# Altium PCB PCB1.PcbDoc (part 2 of 3)
Units mm, origin at the board's own origin, x right, y up, seen from the top; angles counter-clockwise.
Board outline 76.07 x 51.31 mm, 2 copper layers (Top Layer, Bottom Layer), stack 0.771 mm thick; 93 components, 68 nets, 330 pads, 277 vias.
Unrouted connection lines stored in the file: 4.
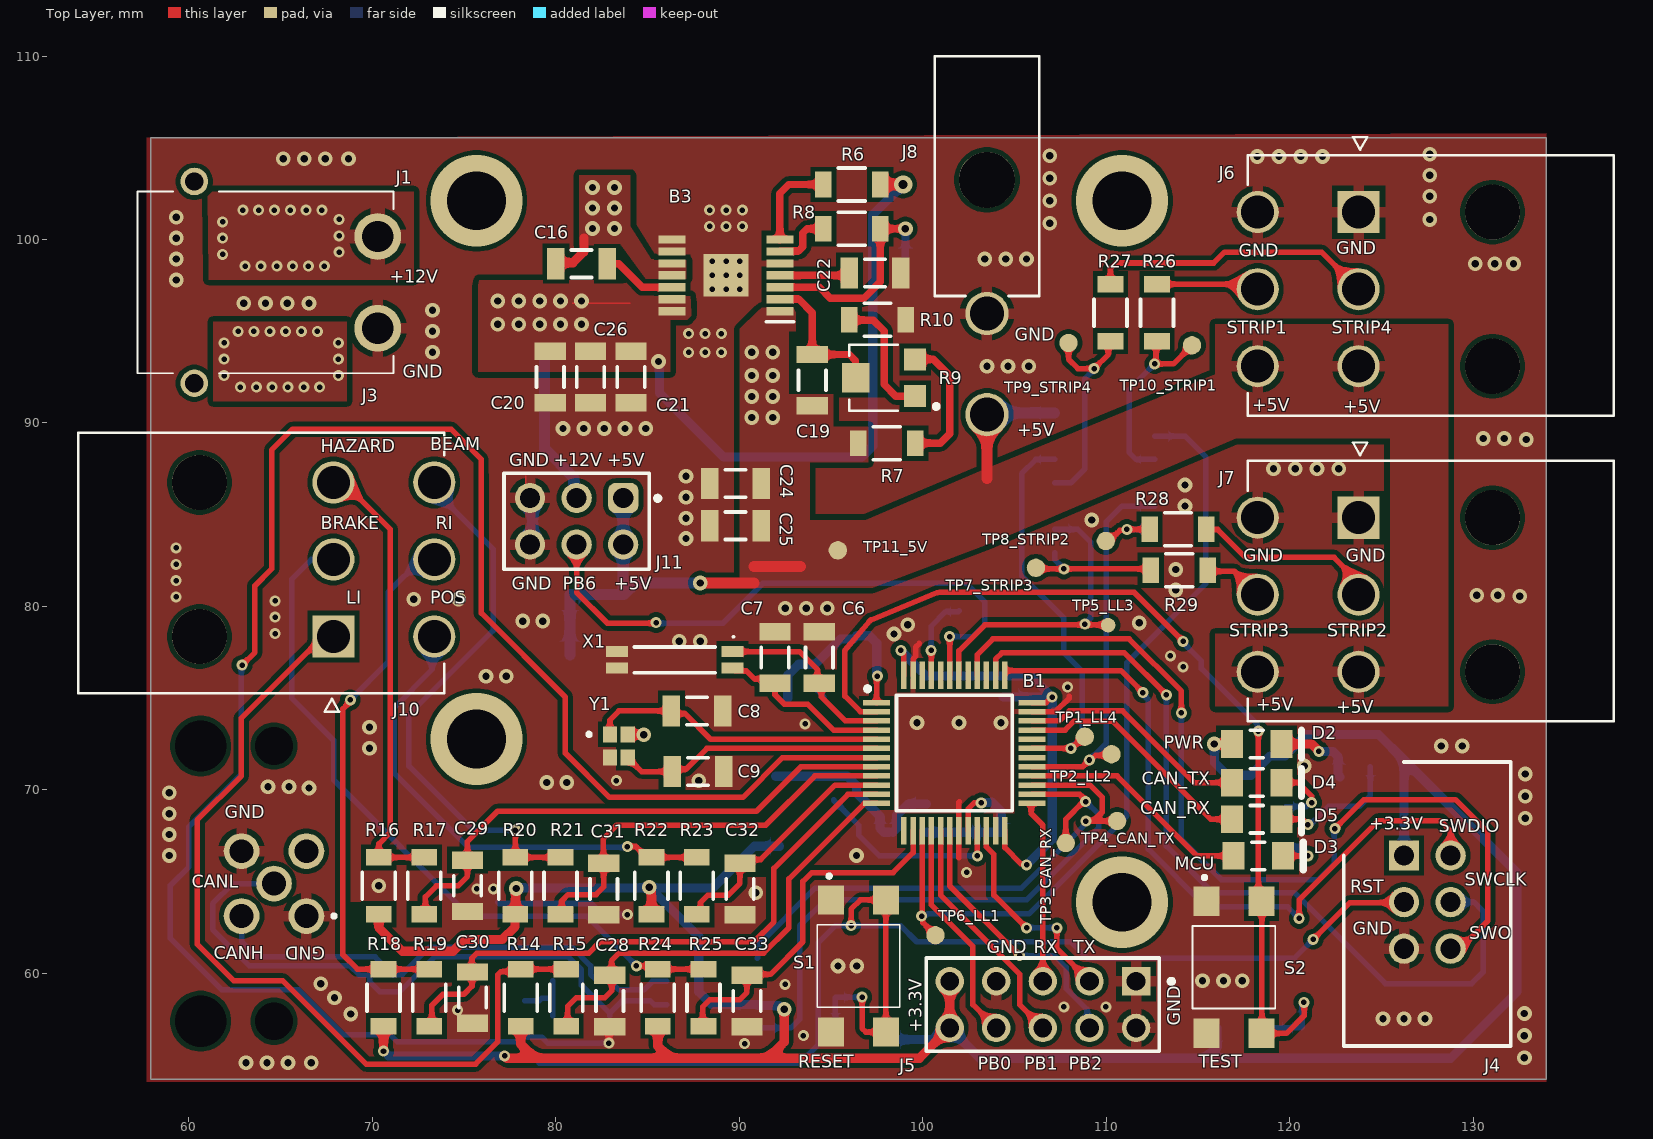
[diagram p0: Top Layer view]

## Part data (continued)
J8: "Pin Header, Power, 2 Rows, 2 Contacts, Through Hole Right Angle, Mini-Fit Jr. 5569", Color=Natural, Contact Resistance=10mΩ, Current Rating=9A, Dielectric Material=Polyamide, Flammability Rating="UL94 V-2", Insulation Resistance=1GΩ, Manufacturer=Molex, Manufacturer Lifecycle Status=ACTIVE, Manufacturer Part Number=39-30-1020, Max Operating Temperature=105°C, Min Operating Temperature=-40°C, Package=None, Supplier Part Number=5109837P, Voltage Rating=600V, Approvals="CSA, TUV, UL", Category="Headers and Wire Housings", Check_prices=https://www.snapeda.com/parts/39301020/Molex/view-part/?ref=eda, China RoHS=Compliant, ComponentLink1Description=https://datasheet.octopart.com:443/39-30-1020-Molex-datasheet-120074128.pdf?src-supplier=IHS, ComponentLink1URL=https://datasheet.octopart.com:443/39-30-1020-Molex-datasheet-120074128.pdf?src-supplier=IHS, ComponentLink2Description=https://datasheet.octopart.com:443/039301020-Molex-datasheet-8338717.pdf?src-supplier=Upverter, ComponentLink2URL=https://datasheet.octopart.com:443/039301020-Molex-datasheet-8338717.pdf?src-supplier=Upverter, ComponentLink3Description=https://datasheet.octopart.com:443/39-30-1020-Molex-datasheet-13785309.pdf?src-supplier=Molex, ComponentLink3URL=https://datasheet.octopart.com:443/39-30-1020-Molex-datasheet-13785309.pdf?src-supplier=Molex, ComponentLink4Description=https://sigma.octopart.com:443/15644801/technical_drawing/Molex-39-30-1020.pdf?src-supplier=Molex, ComponentLink4URL=https://sigma.octopart.com:443/15644801/technical_drawing/Molex-39-30-1020.pdf?src-supplier=Molex, ComponentLink5Description=https://datasheet.octopart.com:443/39-30-1020-Molex-datasheet-36854730.pdf?src-supplier=Farnell, ComponentLink5URL=https://datasheet.octopart.com:443/39-30-1020-Molex-datasheet-36854730.pdf?src-supplier=Farnell, ComponentLink6Description=https://datasheet.octopart.com:443/39-30-1020-Molex-datasheet-101582405.pdf?src-supplier=Farnell, ComponentLink6URL=https://datasheet.octopart.com:443/39-30-1020-Molex-datasheet-101582405.pdf?src-supplier=Farnell, ComponentLink7Description=https://datasheet.octopart.com:443/39-30-1020-..-Molex-datasheet-81470918.pdf?src-supplier=Farnell, ComponentLink7URL=https://datasheet.octopart.com:443/39-30-1020-..-Molex-datasheet-81470918.pdf?src-supplier=Farnell, ComponentLink8Description=https://datasheet.octopart.com:443/39-30-1020-Molex-datasheet-14711183.pdf?src-supplier=Farnell, ComponentLink8URL=https://datasheet.octopart.com:443/39-30-1020-Molex-datasheet-14711183.pdf?src-supplier=Farnell, ComponentLink9Description=https://datasheet.octopart.com:443/39-30-1020-Molex-datasheet-10541087.pdf?src-supplier=Farnell, ComponentLink9URL=https://datasheet.octopart.com:443/39-30-1020-Molex-datasheet-10541087.pdf?src-supplier=Farnell, ComponentLink10Description=https://datasheet.octopart.com:443/39301020-Molex-datasheet-514359.pdf?src-supplier=Farnell, ComponentLink10URL=https://datasheet.octopart.com:443/39301020-Molex-datasheet-514359.pdf?src-supplier=Farnell, ComponentLink11Description=https://datasheet.octopart.com:443/39-30-1020-Molex-datasheet-154749331.pdf?src-supplier=Master+Electronics, ComponentLink11URL=https://datasheet.octopart.com:443/39-30-1020-Molex-datasheet-154749331.pdf?src-supplier=Master+Electronics, ComponentLink12Description=https://datasheet.octopart.com:443/39-30-1020-Molex-datasheet-21827347.pdf?src-supplier=Electro+Sonic, ComponentLink12URL=https://datasheet.octopart.com:443/39-30-1020-Molex-datasheet-21827347.pdf?src-supplier=Electro+Sonic, ComponentLink13Description=https://datasheet.octopart.com:443/39-30-1020-Molex-datasheet-62104194.pdf?src-supplier=Electro+Sonic, ComponentLink13URL=https://datasheet.octopart.com:443/39-30-1020-Molex-datasheet-62104194.pdf?src-supplier=Electro+Sonic, ComponentLink14Description=https://datasheet.octopart.com:443/39-30-1020-Molex-datasheet-140183168.pdf?src-supplier=RS+(Formerly+Allied+Electronics), ComponentLink14URL=https://datasheet.octopart.com:443/39-30-1020-Molex-datasheet-140183168.pdf?src-supplier=RS+(Formerly+Allied+Electronics), ComponentLink15Description=https://datasheet.octopart.com:443/39-30-1020-Molex-datasheet-120148721.pdf?src-supplier=RS+(Formerly+Allied+Electronics), ComponentLink15URL=https://datasheet.octopart.com:443/39-30-1020-Molex-datasheet-120148721.pdf?src-supplier=RS+(Formerly+Allied+Electronics), ComponentLink16Description=https://datasheet.octopart.com:443/39-30-1020-Molex-datasheet-34442213.pdf?src-supplier=RS+(Formerly+Allied+Electronics), ComponentLink16URL=https://datasheet.octopart.com:443/39-30-1020-Molex-datasheet-34442213.pdf?src-supplier=RS+(Formerly+Allied+Electronics), ComponentLink17Description=https://datasheet.octopart.com:443/39-30-1020-Molex-datasheet-9997016.pdf?src-supplier=RS+(Formerly+Allied+Electronics), ComponentLink17URL=https://datasheet.octopart.com:443/39-30-1020-Molex-datasheet-9997016.pdf?src-supplier=RS+(Formerly+Allied+Electronics), ComponentLink18Description=https://datasheet.octopart.com:443/39-30-1020-Molex-datasheet-46140.pdf?src-supplier=RS+(Formerly+Allied+Electronics), ComponentLink18URL=https://datasheet.octopart.com:443/39-30-1020-Molex-datasheet-46140.pdf?src-supplier=RS+(Formerly+Allied+Electronics), ComponentLink19Description=https://datasheet.octopart.com:443/39301020-Molex-datasheet-82994803.pdf?src-supplier=Newark, ComponentLink19URL=https://datasheet.octopart.com:443/39301020-Molex-datasheet-82994803.pdf?src-supplier=Newark, ComponentLink20Description=https://datasheet.octopart.com:443/39-30-1020-Molex-datasheet-33002868.pdf?src-supplier=Newark, ComponentLink20URL=https://datasheet.octopart.com:443/39-30-1020-Molex-datasheet-33002868.pdf?src-supplier=Newark, ComponentLink21Description=https://datasheet.octopart.com:443/39-30-1020-Molex-datasheet-21207481.pdf?src-supplier=Newark, ComponentLink21URL=https://datasheet.octopart.com:443/39-30-1020-Molex-datasheet-21207481.pdf?src-supplier=Newark, ComponentLink22Description=https://datasheet.octopart.com:443/39-30-1020-Molex-datasheet-2405.pdf?src-supplier=Newark, ComponentLink22URL=https://datasheet.octopart.com:443/39-30-1020-Molex-datasheet-2405.pdf?src-supplier=Newark, ComponentLink23Description=https://datasheet.octopart.com:443/39301020-Molex-datasheet-137316104.pdf?src-supplier=Future+Electronics, ComponentLink23URL=https://datasheet.octopart.com:443/39301020-Molex-datasheet-137316104.pdf?src-supplier=Future+Electronics, ComponentLink24Description=https://datasheet.octopart.com:443/39-30-1020-Molex-datasheet-21395541.pdf?src-supplier=TME, ComponentLink24URL=https://datasheet.octopart.com:443/39-30-1020-Molex-datasheet-21395541.pdf?src-supplier=TME, ComponentLink25Description=https://datasheet.octopart.com:443/39301020-Molex-datasheet-7600579.pdf?src-supplier=Jameco, ComponentLink25URL=https://datasheet.octopart.com:443/39301020-Molex-datasheet-7600579.pdf?src-supplier=Jameco, ComponentLink26Description=https://datasheet.octopart.com:443/39-30-1020-Molex-datasheet-46912895.pdf?src-supplier=Jameco, ComponentLink26URL=https://datasheet.octopart.com:443/39-30-1020-Molex-datasheet-46912895.pdf?src-supplier=Jameco, ComponentLink27Description=https://datasheet.octopart.com:443/39-30-1020-Molex-datasheet-131607.pdf?src-supplier=DigiKey, ComponentLink27URL=https://datasheet.octopart.com:443/39-30-1020-Molex-datasheet-131607.pdf?src-supplier=DigiKey, ComponentLink28Description=http://sigma.octopart.com:80/15645372/rohs_certificate/Molex-39-30-1020.pdf?src-supplier=Compliance+Statements, ComponentLink28URL=http://sigma.octopart.com:80/15645372/rohs_certificate/Molex-39-30-1020.pdf?src-supplier=Compliance+Statements, ComponentLink29Description=http://sigma.octopart.com:80/conflict_mineral_statement/Molex-company-72.pdf?src-supplier=Compliance+Statements, ComponentLink29URL=http://sigma.octopart.com:80/conflict_mineral_statement/Molex-company-72.pdf?src-supplier=Compliance+Statements, ComponentLink30Description=http://sigma.octopart.com:80/rohs_statement/Molex-company-73.pdf?src-supplier=Compliance+Statements, ComponentLink30URL=http://sigma.octopart.com:80/rohs_statement/Molex-company-73.pdf?src-supplier=Compliance+Statements, ComponentLink31Description=http://sigma.octopart.com:80/reach_statement/Molex-company-74.pdf?src-supplier=Compliance+Statements, ComponentLink31URL=http://sigma.octopart.com:80/reach_statement/Molex-company-74.pdf?src-supplier=Compliance+Statements, Connector Type="Power, Rectangular", Contact Gender=Male, Contact Material=Brass, Contact Plating=Tin, Country of Origin=US, Depth=13.38mm, ELV=Compliant, Gender=Male, Glow Wire Compliant=Non-compliant, Halogen Free="Low Halogen", Height=14.76mm, Housing Material=Nylon, Lead Free="Lead Free", Lead Pitch=4.2mm, Length=36.07mm, Lifecycle Status=Production, Material=Nylon, MF=Molex, Mounting Technology="PCB, Through Hole", MP=39301020, Number of Circuits=2, Number of Contacts=2, Number of Poles=2, Number of Positions=2, Number of Rows=2, Orientation="Right Angle", Pins=2, Pitch=4.2mm, Plating Thickness=2.54µm, Radiation Hardening=No, REACH SVHC=Yes, RoHS=Compliant, Row Spacing=4.2mm, Schedule B="8536694040, 8536694040|8536694040, 8536694040|8536694040|8536694040, 8536694040|8536694040|8536694040|8536694040", SnapEDA_Link=https://www.snapeda.com/parts/39301020/Molex/view-part/?ref=snap, Stock=13288, Supplier=RS, Termination=Solder, Voltage Rating (AC)=600V, Voltage Rating (DC)=600V, Working Voltage=600V
J10: "M12, A Code, 4A, 05 pins, Male Contact, Hexagonal, M12*1.0, PCB 90ø, Front Fastened, IP67", Current Rating=4A, Manufacturer="Amphenol LTW", Manufacturer_Name=Amphenol, Mouser Part Number=523-M12A05PMMRSF7003, Supplier Part Number=50AC2957, Voltage Rating=60V, Arrow Part Number=M12A-05PMMR-SF7003, Arrow Price/Stock=https://www.arrow.com/en/products/m12a-05pmmr-sf7003/amphenol?utm_currency=USD&region=nac, Category="Circular Connectors", ComponentLink1Description=https://datasheet.octopart.com:443/M12A-05PMMR-SF7003-Amphenol-datasheet-182346588.pdf?src-supplier=IHS, ComponentLink1URL=https://datasheet.octopart.com:443/M12A-05PMMR-SF7003-Amphenol-datasheet-182346588.pdf?src-supplier=IHS, ComponentLink2Description=https://datasheet.octopart.com:443/M12A-05PMMR-SF7003-Amphenol-LTW-datasheet-184719079.pdf?src-supplier=TME, ComponentLink2URL=https://datasheet.octopart.com:443/M12A-05PMMR-SF7003-Amphenol-LTW-datasheet-184719079.pdf?src-supplier=TME, ComponentLink3Description=https://datasheet.octopart.com:443/M12A-05PMMR-SF7003-Amphenol-LTW-datasheet-180194516.pdf?src-supplier=JRH+Electronics, ComponentLink3URL=https://datasheet.octopart.com:443/M12A-05PMMR-SF7003-Amphenol-LTW-datasheet-180194516.pdf?src-supplier=JRH+Electronics, Connector Type=Signal, Datasheet Link=https://amphenolltw.com/down.php?prod_files=605433, Gender=Male, Geometry.Height=15mm, Lifecycle Status=Production, Manufacturer Part Number=M12A-05PMMR-SF7003, Manufacturer_Part_Number=M12A-05PMMR-SF7003, Mouser Price/Stock=https://www.mouser.co.uk/ProductDetail/Amphenol-LTW/M12A-05PMMR-SF7003?qs=f9yNj16SXrIdWSE1H9dLLQ%3D%3D, Number of Positions=5, Pins=5, RoHS=Compliant, Stock=32, Supplier=Avnet
J11: library part CMP-1502-01072-3, Color=Black, Contact Resistance=20mΩ, Current Rating=3A, Max Operating Temperature=105°C, Min Operating Temperature=-40°C, Operating Supply Voltage=250V, Connector Type="Male Pin", Contact Material=Copper, Contact Mating Length=5.9944mm, Contact Plating=Gold, Gender=Male, Height=8.89mm, Lead Pitch=2.54mm, Mount="Through Hole", NexarPartId=32855529, Number of Contacts=6, Number of Pins=6, Number of Positions=6, Number of Rows=2, Orientation=Vertical, Packaging=Bulk, Pitch=2.54mm, REACH SVHC=Unknown, RoHS=Compliant, Row Spacing=2.54mm, Termination=Solder, Voltage Rating=250V
L1 L2: "Ferrite Beads Multi-Layer 600Ohm 25% 100MHz 1A 0.15Ohm DCR 0603 T/R", Case Code (Imperial)=0603, Case Code (Metric)=1608, Clock Frequency=100MHz, Current Rating=1A, DC Resistance (DCR)=150mΩ, Manufacturer=TDK, Manufacturer Lifecycle Status=PRODUCTION, Max Operating Temperature=125°C, Min Operating Temperature=-55°C, Package="0603 TDK", Supplier Part Number=2800777, Tolerance=25%, Case/Package=0603, Category="Ferrite Beads and Chips", Check_prices=https://www.snapeda.com/parts/MPZ1608S601ATA00/TDK/view-part/?ref=eda, China RoHS=Compliant, ComponentLink1Description=https://datasheet.octopart.com:443/MPZ1608S601ATA00-TDK-datasheet-155380319.pdf?src-supplier=TDK, ComponentLink1URL=https://datasheet.octopart.com:443/MPZ1608S601ATA00-TDK-datasheet-155380319.pdf?src-supplier=TDK, ComponentLink2Description=https://datasheet.octopart.com:443/MPZ1608S601ATA00-TDK-datasheet-141913842.pdf?src-supplier=TME, ComponentLink2URL=https://datasheet.octopart.com:443/MPZ1608S601ATA00-TDK-datasheet-141913842.pdf?src-supplier=TME, ComponentLink3Description=https://datasheet.octopart.com:443/MPZ1608S601ATA00-TDK-datasheet-82475260.pdf?src-supplier=Newark, ComponentLink3URL=https://datasheet.octopart.com:443/MPZ1608S601ATA00-TDK-datasheet-82475260.pdf?src-supplier=Newark, ComponentLink4Description=https://datasheet.octopart.com:443/MPZ1608S601ATA00-TDK-datasheet-99917310.pdf?src-supplier=Newark, ComponentLink4URL=https://datasheet.octopart.com:443/MPZ1608S601ATA00-TDK-datasheet-99917310.pdf?src-supplier=Newark, ComponentLink5Description=https://datasheet.octopart.com:443/MPZ1608S601ATA00-TDK-datasheet-8852356.pdf?src-supplier=Newark, ComponentLink5URL=https://datasheet.octopart.com:443/MPZ1608S601ATA00-TDK-datasheet-8852356.pdf?src-supplier=Newark, ComponentLink6Description=https://datasheet.octopart.com:443/MPZ1608S601ATA00-TDK-datasheet-21631858.pdf?src-supplier=Farnell, ComponentLink6URL=https://datasheet.octopart.com:443/MPZ1608S601ATA00-TDK-datasheet-21631858.pdf?src-supplier=Farnell, ComponentLink7Description=https://datasheet.octopart.com:443/MPZ1608S601ATA00-TDK-datasheet-38423207.pdf?src-supplier=Future+Electronics, ComponentLink7URL=https://datasheet.octopart.com:443/MPZ1608S601ATA00-TDK-datasheet-38423207.pdf?src-supplier=Future+Electronics, Core Material=Ferrite, Depth=800µm, ESR=150mΩ, Height=800µm, Impedance=600Ω, Lead Free="Lead Free", Length=1.6mm, Lifecycle Status=Production, Manufacturer Part Number=MPZ1608S601ATA00, Max DC Current=1A, Max Length=1.75mm, Max Width=950µm, MF=TDK, Min Length=1.45mm, Min Width=650µm, Mounting Technology="Surface Mount", MP=MPZ1608S601ATA00, Number of Circuits=1, Number of Terminals=2, Packaging="Cut Tape", REACH SVHC=Yes, RMS Current (Irms)=1A, RoHS=Compliant, Schedule B="8504500000, 8504500000|8504500000|8504500000|8504500000|8504500000", SnapEDA_Link=https://www.snapeda.com/parts/MPZ1608S601ATA00/TDK/view-part/?ref=snap, Stock=80000, Supplier=Farnell, Termination=SMD/SMT, Test Frequency=100MHz, Weight=2.012816mg, Width=800µm
L3: "Inductor High Current Shielded Wirewound 3.3uH 20% 100KHz 10A 11.8mOhm DCR 4040 T/R", Case Code (Imperial)=4040, Current Rating=10A, DC Resistance (DCR)=11.8mΩ, Inductance Tolerance=20%, Manufacturer=Vishay, Max DC Current=18.6A, Max Operating Temperature=125°C, Min Operating Temperature=-55°C, Mouser Part Number=70-IHLP4040DZER3R3M0, Self Resonant Frequency=5MHz, Supplier Part Number=1547037, Test Frequency=100kHz, Arrow Part Number=IHLP4040DZER3R3M01, Arrow Price/Stock=https://www.arrow.com/en/products/ihlp4040dzer3r3m01/vishay?region=nac, Case/Package=4040, Category="Fixed Inductors", China RoHS=Compliant, ComponentLink1Description=https://datasheet.octopart.com:443/IHLP4040DZER3R3M01-Vishay-datasheet-181468593.pdf?src-supplier=IHS, ComponentLink1URL=https://datasheet.octopart.com:443/IHLP4040DZER3R3M01-Vishay-datasheet-181468593.pdf?src-supplier=IHS, ComponentLink2Description=https://datasheet.octopart.com:443/IHLP4040DZER3R3M01-Vishay-Dale-datasheet-181465866.pdf?src-supplier=IHS, ComponentLink2URL=https://datasheet.octopart.com:443/IHLP4040DZER3R3M01-Vishay-Dale-datasheet-181465866.pdf?src-supplier=IHS, ComponentLink3Description=https://datasheet.octopart.com:443/IHLP4040DZER3R3M01-Vishay-datasheet-67039456.pdf?src-supplier=Farnell, ComponentLink3URL=https://datasheet.octopart.com:443/IHLP4040DZER3R3M01-Vishay-datasheet-67039456.pdf?src-supplier=Farnell, ComponentLink4Description=https://datasheet.octopart.com:443/IHLP4040DZER3R3M01-Vishay-datasheet-167142.pdf?src-supplier=Farnell, ComponentLink4URL=https://datasheet.octopart.com:443/IHLP4040DZER3R3M01-Vishay-datasheet-167142.pdf?src-supplier=Farnell, ComponentLink5Description=https://datasheet.octopart.com/IHLP4040DZER3R3M01-Vishay-datasheet-12542609.pdf, ComponentLink5URL=https://datasheet.octopart.com/IHLP4040DZER3R3M01-Vishay-datasheet-12542609.pdf, ComponentLink6Description=https://datasheet.octopart.com/IHLP4040DZER3R3M01-Vishay-datasheet-12537444.pdf, ComponentLink6URL=https://datasheet.octopart.com/IHLP4040DZER3R3M01-Vishay-datasheet-12537444.pdf, ComponentLink7Description=https://datasheet.octopart.com/IHLP4040DZER3R3M01-Vishay-datasheet-12514016.pdf, ComponentLink7URL=https://datasheet.octopart.com/IHLP4040DZER3R3M01-Vishay-datasheet-12514016.pdf, ComponentLink8Description=https://datasheet.octopart.com/IHLP4040DZER3R3M01-Vishay-datasheet-5394347.pdf, ComponentLink8URL=https://datasheet.octopart.com/IHLP4040DZER3R3M01-Vishay-datasheet-5394347.pdf, ComponentLink9Description=https://datasheet.octopart.com:443/IHLP4040DZER3R3M01-Vishay-datasheet-8434461.pdf?src-supplier=Newark, ComponentLink9URL=https://datasheet.octopart.com:443/IHLP4040DZER3R3M01-Vishay-datasheet-8434461.pdf?src-supplier=Newark, ComponentLink10Description=https://datasheet.octopart.com:443/IHLP4040DZER3R3M01-Vishay-datasheet-62320562.pdf?src-supplier=element14+APAC, ComponentLink10URL=https://datasheet.octopart.com:443/IHLP4040DZER3R3M01-Vishay-datasheet-62320562.pdf?src-supplier=element14+APAC, ComponentLink11Description=https://datasheet.octopart.com:443/IHLP4040DZER3R3M01-Vishay-datasheet-101783941.pdf?src-supplier=Future+Electronics, ComponentLink11URL=https://datasheet.octopart.com:443/IHLP4040DZER3R3M01-Vishay-datasheet-101783941.pdf?src-supplier=Future+Electronics, ComponentLink12Description=https://datasheet.octopart.com:443/IHLP4040DZER3R3M01-Vishay-datasheet-12531877.pdf?src-supplier=Future+Electronics, ComponentLink12URL=https://datasheet.octopart.com:443/IHLP4040DZER3R3M01-Vishay-datasheet-12531877.pdf?src-supplier=Future+Electronics, ComponentLink13Description=https://datasheet.octopart.com:443/IHLP4040DZER3R3M01-Vishay-Dale-datasheet-42936488.pdf?src-supplier=RS+(Formerly+Allied+Electronics), ComponentLink13URL=https://datasheet.octopart.com:443/IHLP4040DZER3R3M01-Vishay-Dale-datasheet-42936488.pdf?src-supplier=RS+(Formerly+Allied+Electronics), ComponentLink14Description=https://datasheet.octopart.com:443/IHLP4040DZER3R3M01-Vishay-datasheet-140572121.pdf?src-supplier=Arrow.cn, ComponentLink14URL=https://datasheet.octopart.com:443/IHLP4040DZER3R3M01-Vishay-datasheet-140572121.pdf?src-supplier=Arrow.cn, ComponentLink15Description=http://sigma.octopart.com:80/rohs_statement/Vishay-company-15.pdf?src-supplier=Compliance+Statements, ComponentLink15URL=http://sigma.octopart.com:80/rohs_statement/Vishay-company-15.pdf?src-supplier=Compliance+Statements, Composition=Wirewound, Contact Plating=Tin, Core Material=Composite, Datasheet Link=https://www.vishay.com/docs/34193/ihlp-4040dz-01.pdf, Depth=10.3mm, ESR=14.4mΩ, Geometry.Height=4mm, Height=4mm, Height - Seated (Max)=3.9878mm, Lead Free="Lead Free", Lifecycle Status=Production, Manufacturer Part Number=IHLP4040DZER3R3M01, Manufacturer_Name=Vishay, Manufacturer_Part_Number=IHLP4040DZER3R3M01, Max Current Rating=10A, Military Standard=Not, Mounting Technology="Surface Mount", Mouser Price/Stock=https://www.mouser.co.uk/ProductDetail/Vishay-Dale/IHLP4040DZER3R3M01?qs=UUKq9QDXQ0nKJM%252B3xlQGHA%3D%3D, Number of Circuits=1, Number of Terminals=2, Radiation Hardening=No, REACH SVHC=Yes, RMS Current (Irms)=10A, RoHS=Compliant, Saturation Current=18.6A, Schedule B="8504500000, 8504500000|8504500000|8504500000|8504500000|8504500000", Shielding=Yes, Stock=559, Supplier=Farnell, Termination=SMD/SMT, Tolerance=20%, Weight=2.000002g, Width=10.16mm
R1 R2 R3 R4 R5 R6 R7 R8 R10 R11 R12 R13 R14 R15 R16 R17 R18 R19 R20 R21 R22 R23 R24 R25 R26 R27 R28 R29 R30: library part CMP-04015-098385-1, "40.2kΩ ±1% 0.25W Chip Resistor 1206 Thick Film AEC-Q200 Qualified", Case Code (Imperial)=1206, Case Code (Metric)=3216, Max Operating Temperature=155°C, Min Operating Temperature=-55°C, Package Quantity=5000, Power Rating=250mW, Resistance=40.2kR, Temperature Coefficient=100ppm/°C, Tolerance=1%, Voltage Rating=200V, Case/Package=1206, Height=0.6mm, Lead Free="Contains Lead", Length=3.2mm, Packaging="Tape and Reel", RoHS Compliant=No, Series=RK73H, Termination=SMD/SMT, Voltage Rating (DC)=200V, Width=1.6mm
R9: library part TC33X-2-503E, "Adjustable Resistors – SMD; BOURNS; TC33X-2-503E; Cermet; 1.2 mm; 100 mW; Surface Mount", Color=Silver, Manufacturer=Bourns, Max Operating Temperature=100°C, Max Power Dissipation=100mW, Min Operating Temperature=-40°C, Package="1608 Bourns", Power Dissipation=150mW, Supplier Part Number=TC33X-503ECT-ND, Temperature Coefficient=250ppm/°C, Tolerance=25%, Voltage Rating (DC)=50V, Category="Variable Resistors and Potentiometers", Check_prices=https://www.snapeda.com/parts/TC33X-2-503E/Bourns/view-part/467769/?ref=eda, ComponentLink1Description=https://datasheet.octopart.com:443/TC33X-2-503E-Bourns-datasheet-182142024.pdf?src-supplier=IHS, ComponentLink1URL=https://datasheet.octopart.com:443/TC33X-2-503E-Bourns-datasheet-182142024.pdf?src-supplier=IHS, ComponentLink2Description=https://datasheet.octopart.com:443/TC33X-2-503E-Bourns-datasheet-11551316.pdf?src-supplier=Electro+Sonic, ComponentLink2URL=https://datasheet.octopart.com:443/TC33X-2-503E-Bourns-datasheet-11551316.pdf?src-supplier=Electro+Sonic, ComponentLink3Description=https://datasheet.octopart.com:443/TC33X-2-503E-Bourns-datasheet-154730028.pdf?src-supplier=Electro+Sonic, ComponentLink3URL=https://datasheet.octopart.com:443/TC33X-2-503E-Bourns-datasheet-154730028.pdf?src-supplier=Electro+Sonic, ComponentLink4Description=https://datasheet.octopart.com:443/TC33X-2-503E-Bourns-datasheet-67039831.pdf?src-supplier=element14+APAC, ComponentLink4URL=https://datasheet.octopart.com:443/TC33X-2-503E-Bourns-datasheet-67039831.pdf?src-supplier=element14+APAC, ComponentLink5Description=https://datasheet.octopart.com:443/TC33X-2-503E-Bourns-datasheet-164917123.pdf?src-supplier=Newark, ComponentLink5URL=https://datasheet.octopart.com:443/TC33X-2-503E-Bourns-datasheet-164917123.pdf?src-supplier=Newark, ComponentLink6Description=https://datasheet.octopart.com:443/TC33X-2-503E-Bourns-datasheet-26822215.pdf?src-supplier=Newark, ComponentLink6URL=https://datasheet.octopart.com:443/TC33X-2-503E-Bourns-datasheet-26822215.pdf?src-supplier=Newark, ComponentLink7Description=https://datasheet.octopart.com:443/TC33X-2-503E-Bourns-datasheet-41964919.pdf?src-supplier=Newark, ComponentLink7URL=https://datasheet.octopart.com:443/TC33X-2-503E-Bourns-datasheet-41964919.pdf?src-supplier=Newark, ComponentLink8Description=https://datasheet.octopart.com:443/TC33X-2-503E-Bourns-datasheet-47549324.pdf?src-supplier=RS+(Formerly+Allied+Electronics), ComponentLink8URL=https://datasheet.octopart.com:443/TC33X-2-503E-Bourns-datasheet-47549324.pdf?src-supplier=RS+(Formerly+Allied+Electronics), ComponentLink9Description=https://datasheet.octopart.com:443/TC33X-2-503E-Bourns-datasheet-549861.pdf?src-supplier=RS+(Formerly+Allied+Electronics), ComponentLink9URL=https://datasheet.octopart.com:443/TC33X-2-503E-Bourns-datasheet-549861.pdf?src-supplier=RS+(Formerly+Allied+Electronics), ComponentLink10Description=https://datasheet.octopart.com:443/TC33X-2-503E-Bourns-datasheet-21366158.pdf?src-supplier=Farnell, ComponentLink10URL=https://datasheet.octopart.com:443/TC33X-2-503E-Bourns-datasheet-21366158.pdf?src-supplier=Farnell, ComponentLink11Description=https://datasheet.octopart.com:443/TC33X-2-503E-Bourns-datasheet-38800.pdf?src-supplier=Farnell, ComponentLink11URL=https://datasheet.octopart.com:443/TC33X-2-503E-Bourns-datasheet-38800.pdf?src-supplier=Farnell, ComponentLink12Description=https://datasheet.octopart.com:443/TC33X-2-503E-Bourns-datasheet-5319878.pdf?src-supplier=element14, ComponentLink12URL=https://datasheet.octopart.com:443/TC33X-2-503E-Bourns-datasheet-5319878.pdf?src-supplier=element14, ComponentLink13Description=https://datasheet.octopart.com:443/TC33X-2-503E-Bourns-datasheet-14175263.pdf?src-supplier=iiiC, ComponentLink13URL=https://datasheet.octopart.com:443/TC33X-2-503E-Bourns-datasheet-14175263.pdf?src-supplier=iiiC, ComponentLink14Description=https://datasheet.octopart.com:443/TC33X-2-503E-Bourns-datasheet-39003.pdf?src-supplier=Mouser, ComponentLink14URL=https://datasheet.octopart.com:443/TC33X-2-503E-Bourns-datasheet-39003.pdf?src-supplier=Mouser, ComponentLink15Description=http://sigma.octopart.com:80/conflict_mineral_statement/Bourns-company-36.pdf?src-supplier=Compliance+Statements, ComponentLink15URL=http://sigma.octopart.com:80/conflict_mineral_statement/Bourns-company-36.pdf?src-supplier=Compliance+Statements, Composition=Cermet, Depth=3.8mm, Digi-Key_Part_Number=TC33X-503ECT-ND, Height=1.2mm, Lead Free="Contains Lead", Length=3.8mm, Lifecycle Status=Production, Manufacturer Part Number=TC33X-2-503E, MF=Bourns, Military Standard=Not, Mounting Technology="Surface Mount", MP=TC33X-2-503E, Number of Terminals=3, Number of Turns=1, Packaging="Cut Tape", Power Rating=100mW, Pricing="1=0,25, 10=0,213, 25=0,1996, 50=0,1896, 100=0,18, 250=0,168, 500=0,15938, 1000=0,15119 (USD)", Purchase-URL=https://pricing.snapeda.com/search/part/TC33X-2-503E/?ref=eda, Radiation Hardening=No, REACH SVHC=Yes, RoHS=Compliant, Schedule B="8533400080, 8533400080|8533400080|8533400080|8533400080|8533400080", SnapEDA_Link=https://www.snapeda.com/parts/TC33X-2-503E/Bourns/view-part/467769/?ref=snap, Stock=2932, Supplier=DigiKey, Termination="Foot Print", Weight=29.4mg, Width=3.6mm, Working Voltage=50V
S1 S2: "TL3305 Ultra-Miniature Tact Switch 100gf 5.0mm actuator Silver Contact Gullwing", Manufacturer=E-Switch, Mouser Part Number=612-TL3305BF100QG, Supplier Part Number=4539028, Category="Tactile Switches", ComponentLink1Description=https://datasheet.octopart.com:443/TL3305BF100QG-E-Switch-datasheet-181388209.pdf?src-supplier=Future+Electronics, ComponentLink1URL=https://datasheet.octopart.com:443/TL3305BF100QG-E-Switch-datasheet-181388209.pdf?src-supplier=Future+Electronics, ComponentLink2Description=https://datasheet.octopart.com:443/TL3305BF100QG-E-Switch-datasheet-188129426.pdf?src-supplier=Future+Electronics, ComponentLink2URL=https://datasheet.octopart.com:443/TL3305BF100QG-E-Switch-datasheet-188129426.pdf?src-supplier=Future+Electronics, Datasheet Link=https://configured-product-images.s3.amazonaws.com/2D/specs/TL3305BF100QG.pdf, Manufacturer Part Number=TL3305BF100QG, Manufacturer_Name=E-Switch, Manufacturer_Part_Number=TL3305BF100QG, Mouser Price/Stock=https://www.mouser.co.uk/ProductDetail/E-Switch/TL3305BF100QG?qs=IKkN%2F947nfDIPwqPQja%252BvQ%3D%3D, RoHS=Compliant, Stock=11760, Supplier=Farnell
U1: "Texas Instruments - SN65HVD232DR - Can Transceiver, 1MBPS, 1/1, 3.3V, SOIC-8, Full Reel", Case/Package=SOIC, Manufacturer="Texas Instruments", Manufacturer Lifecycle Status=ACTIVE, Manufacturer Part Number=SN65HVD232DR, Max Operating Temperature=85°C, Max Supply Voltage=3.6V, Min Operating Temperature=-40°C, Min Supply Voltage=3V, Nominal Supply Current=17mA, Package="SOIC-8 Texas Instruments", Category="CAN Transceivers", Check_prices=https://www.snapeda.com/parts/SN65HVD232D/Texas+Instruments/view-part/?ref=eda, ComponentLink1Description=https://octopart.com:443/opatz8j6/c1?t=KNMFt9M64p-_id6rZ0-P1CX6CGmvk_NFg0bt7DHXbi_P10EFF0MZE_9gM8ERckOxIywTBgDrXd4Bw1XwEAcVVdK92p9CEfdSNaVajf6_bxnez3EeN1RE1wZBaojbXTwQ_101S7Bb856c3hUAWErS0_zGIM1B6Z6dFQwv_Ps2SUdVVUCjmJkLnMLZKTBWfnIVcgJIheW78JYanUyW_1u-I93chBuiSPXQYIk2xXb9JgOyrE9lHEnesRSQq9luJOd1yknyGQP0N3Is0_dGM9QrGV5UOgjoada9tMnQwKJP8gahr3iTK59XJFH6OfbHTOm3R9BdESCrBMbrE2MVOGPPkVOTrqf0YMovDpmf-konbncFnSES8CNOhHqMwHv2HEwKcPoK44nl&src-supplier=Texas+Instruments, ComponentLink1URL=https://octopart.com:443/opatz8j6/c1?t=KNMFt9M64p-_id6rZ0-P1CX6CGmvk_NFg0bt7DHXbi_P10EFF0MZE_9gM8ERckOxIywTBgDrXd4Bw1XwEAcVVdK92p9CEfdSNaVajf6_bxnez3EeN1RE1wZBaojbXTwQ_101S7Bb856c3hUAWErS0_zGIM1B6Z6dFQwv_Ps2SUdVVUCjmJkLnMLZKTBWfnIVcgJIheW78JYanUyW_1u-I93chBuiSPXQYIk2xXb9JgOyrE9lHEnesRSQq9luJOd1yknyGQP0N3Is0_dGM9QrGV5UOgjoada9tMnQwKJP8gahr3iTK59XJFH6OfbHTOm3R9BdESCrBMbrE2MVOGPPkVOTrqf0YMovDpmf-konbncFnSES8CNOhHqMwHv2HEwKcPoK44nl&src-supplier=Texas+Instruments, ComponentLink2Description=https://sigma.octopart.com:443/49249642/technical_drawing/Texas-Instruments-SN65HVD232DR.pdf?src-supplier=Texas+Instruments, ComponentLink2URL=https://sigma.octopart.com:443/49249642/technical_drawing/Texas-Instruments-SN65HVD232DR.pdf?src-supplier=Texas+Instruments, ComponentLink3Description=https://datasheet.octopart.com:443/SN65HVD232DR-Texas-Instruments-datasheet-81447765.pdf?src-supplier=Upverter, ComponentLink3URL=https://datasheet.octopart.com:443/SN65HVD232DR-Texas-Instruments-datasheet-81447765.pdf?src-supplier=Upverter, ComponentLink4Description=https://datasheet.octopart.com:443/SN65HVD232DR-Texas-Instruments-datasheet-37140773.pdf?src-supplier=Newark, ComponentLink4URL=https://datasheet.octopart.com:443/SN65HVD232DR-Texas-Instruments-datasheet-37140773.pdf?src-supplier=Newark, ComponentLink5Description=https://datasheet.octopart.com:443/SN65HVD232DR-Texas-Instruments-datasheet-14436966.pdf?src-supplier=Newark, ComponentLink5URL=https://datasheet.octopart.com:443/SN65HVD232DR-Texas-Instruments-datasheet-14436966.pdf?src-supplier=Newark, ComponentLink6Description=https://datasheet.octopart.com:443/SN65HVD232DR-Texas-Instruments-datasheet-58296547.pdf?src-supplier=Newark, ComponentLink6URL=https://datasheet.octopart.com:443/SN65HVD232DR-Texas-Instruments-datasheet-58296547.pdf?src-supplier=Newark, ComponentLink7Description=https://datasheet.octopart.com:443/SN65HVD232DR-Texas-Instruments-datasheet-48117850.pdf?src-supplier=Newark, ComponentLink7URL=https://datasheet.octopart.com:443/SN65HVD232DR-Texas-Instruments-datasheet-48117850.pdf?src-supplier=Newark, ComponentLink8Description=https://datasheet.octopart.com:443/SN65HVD232DR-Texas-Instruments-datasheet-10256024.pdf?src-supplier=Arrow+Electronics, ComponentLink8URL=https://datasheet.octopart.com:443/SN65HVD232DR-Texas-Instruments-datasheet-10256024.pdf?src-supplier=Arrow+Electronics, ComponentLink9Description=https://datasheet.octopart.com:443/SN65HVD232DR-Texas-Instruments-datasheet-149765.pdf?src-supplier=Mouser, ComponentLink9URL=https://datasheet.octopart.com:443/SN65HVD232DR-Texas-Instruments-datasheet-149765.pdf?src-supplier=Mouser, ComponentLink10Description=https://datasheet.octopart.com:443/SN65HVD232DR-Texas-Instruments-datasheet-62292544.pdf?src-supplier=Farnell, ComponentLink10URL=https://datasheet.octopart.com:443/SN65HVD232DR-Texas-Instruments-datasheet-62292544.pdf?src-supplier=Farnell, ComponentLink11Description=https://datasheet.octopart.com:443/SN65HVD232DR-Texas-Instruments-datasheet-164416263.pdf?src-supplier=SHENGYU+ELECTRONICS, ComponentLink11URL=https://datasheet.octopart.com:443/SN65HVD232DR-Texas-Instruments-datasheet-164416263.pdf?src-supplier=SHENGYU+ELECTRONICS, ComponentLink12Description=https://datasheet.octopart.com:443/SN65HVD232DR-Texas-Instruments-datasheet-159115712.pdf?src-supplier=LCSC, ComponentLink12URL=https://datasheet.octopart.com:443/SN65HVD232DR-Texas-Instruments-datasheet-159115712.pdf?src-supplier=LCSC, ComponentLink13Description=https://datasheet.octopart.com:443/SN65HVD232DR-Texas-Instruments-datasheet-137316104.pdf?src-supplier=Future+Electronics, ComponentLink13URL=https://datasheet.octopart.com:443/SN65HVD232DR-Texas-Instruments-datasheet-137316104.pdf?src-supplier=Future+Electronics, ComponentLink14Description=https://datasheet.octopart.com:443/SN65HVD232DR-Texas-Instruments-datasheet-8625468.pdf?src-supplier=Verical, ComponentLink14URL=https://datasheet.octopart.com:443/SN65HVD232DR-Texas-Instruments-datasheet-8625468.pdf?src-supplier=Verical, ComponentLink15Description=https://datasheet.octopart.com:443/SN65HVD232DR-Texas-Instruments-datasheet-8378736.pdf?src-supplier=Verical, ComponentLink15URL=https://datasheet.octopart.com:443/SN65HVD232DR-Texas-Instruments-datasheet-8378736.pdf?src-supplier=Verical, ComponentLink16Description=http://sigma.octopart.com:80/conflict_mineral_statement/Texas-Instruments-company-63.pdf?src-supplier=Compliance+Statements, ComponentLink16URL=http://sigma.octopart.com:80/conflict_mineral_statement/Texas-Instruments-company-63.pdf?src-supplier=Compliance+Statements, ComponentLink17Description=http://sigma.octopart.com:80/reach_statement/Texas-Instruments-company-64.pdf?src-supplier=Compliance+Statements, ComponentLink17URL=http://sigma.octopart.com:80/reach_statement/Texas-Instruments-company-64.pdf?src-supplier=Compliance+Statements, Data Rate=1Mbps, Height=1.75mm, Lead Free="Lead Free", Length=4.9mm, Lifecycle Status=Production, MF="Texas Instruments", MP=SN65HVD232D, Number of Drivers=1, Number of Receive Buffers=1, Number of Receivers=1, Number of Transceivers=1, Number of Transmit Buffers=1, Packaging="Cut Tape", Pins=8, Pricing="2500=1,1159, 5000=1,076, 7500=1,062 (USD)", Radiation Hardening=No, REACH SVHC=No, RoHS=Compliant, Schedule B="8542390000, 8542390000|8542390000|8542390000|8542390000|8542390000", SnapEDA_Link=https://www.snapeda.com/parts/SN65HVD232D/Texas+Instruments/view-part/?ref=snap, Stock=10000, Supplier="Arrow Electronics", Supplier Part Number=SN65HVD232DR, Thickness=1.58mm, Weight=72.603129mg, Width=3.91mm
U2: "Fixed Positive LDO Regulator", Manufacturer=Diotec, Supplier Part Number=637-LDI1117-3.3H, Category="Voltage Regulators - Linear", ComponentLink1Description=https://datasheet.octopart.com/LDI1117-3.3H-Diotec-datasheet-154607892.pdf?src-supplier=TME, ComponentLink1URL=https://datasheet.octopart.com/LDI1117-3.3H-Diotec-datasheet-154607892.pdf?src-supplier=TME, ComponentLink2Description=https://datasheet.octopart.com/LDI1117-3.3H-Diotec-datasheet-159101088.pdf?src-supplier=SOS+electronic, ComponentLink2URL=https://datasheet.octopart.com/LDI1117-3.3H-Diotec-datasheet-159101088.pdf?src-supplier=SOS+electronic, ComponentLink3Description=https://datasheet.octopart.com/LDI1117-3.3H-Diotec-datasheet-189099648.pdf?src-supplier=Master+Electronics, ComponentLink3URL=https://datasheet.octopart.com/LDI1117-3.3H-Diotec-datasheet-189099648.pdf?src-supplier=Master+Electronics, Manufacturer Part Number=LDI1117-3.3H, Pricing="1=0,4, 10=0,286, 50=0,286, 100=0,199, 1000=0,163, 10000=0,089 (USD)", RoHS=No, Stock=5056, Supplier=Mouser
X1: "Parallel - Fundamental Quartz Crystal, 0.032768MHz Nom", Case/Package=SMD/SMT, ESR (Equivalent Series Resistance)=65kΩ, Frequency=32.768kHz, Frequency Tolerance=0.002%, Load Capacitance=12.5pF, Manufacturer=TXC, Manufacturer_Name="TXC CORPORATION", Max Operating Temperature=85°C, Min Operating Temperature=-40°C, Mouser Part Number=717-9HT7-32.768KDZFT, Supplier Part Number=2819319, Arrow Part Number=9HT7-32.768KDZF-T, Arrow Price/Stock=https://www.arrow.com/en/products/9ht7-32.768kdzf-t/txc-corporation?region=nac, Category=Crystals, ComponentLink1Description=https://datasheet.octopart.com:443/9HT7-32.768KDZF-T-TXC-datasheet-21225340.pdf?src-supplier=element14+APAC, ComponentLink1URL=https://datasheet.octopart.com:443/9HT7-32.768KDZF-T-TXC-datasheet-21225340.pdf?src-supplier=element14+APAC, ComponentLink2Description=https://datasheet.octopart.com:443/9HT7-32.768KDZF-T-TXC-datasheet-181441158.pdf?src-supplier=Newark, ComponentLink2URL=https://datasheet.octopart.com:443/9HT7-32.768KDZF-T-TXC-datasheet-181441158.pdf?src-supplier=Newark, ComponentLink3Description=https://datasheet.octopart.com:443/9HT7-32.768KDZF-T-TXC-datasheet-188932442.pdf?src-supplier=TME, ComponentLink3URL=https://datasheet.octopart.com:443/9HT7-32.768KDZF-T-TXC-datasheet-188932442.pdf?src-supplier=TME, Datasheet Link=https://componentsearchengine.com/Datasheets/2/9HT7-32.768KDZF-T.pdf, Geometry.Height=1.4mm, Height=508µm, Lead Free="Lead Free", Length=1.4mm, Lifecycle Status=Production, Manufacturer Part Number=9HT7-32.768KDZF-T, Manufacturer_Part_Number=9HT7-32.768KDZF-T, Mounting Technology="Surface Mount", Mouser Price/Stock=https://www.mouser.co.uk/ProductDetail/TXC-Corporation/9HT7-32.768KDZF-T?qs=MEJ8UTjcHDlobjP3Uu4Bsg%3D%3D, Packaging="Tape & Reel", REACH SVHC=No, RoHS=Compliant, Schedule B="8541600080, 8541600080|8541600080|8541600080|8541600080|8541600080|8541600080|8541600080|8541600080|8541600080|8541600080|8541600080|8541600080|8541600080|8541600080|8541600080|8541600080|8541600080|8541600080|8541600080|8541600080|8541600080|8541600080|8541600080|85", Stock=7957, Supplier=Farnell, Termination=SMD/SMT, Tolerance=0.002%, Width=1.397mm
Y1: "Crystal, Quartz, 24 MHz, SMD, 2mm x 1.6mm x 0.5mm, 20 ppm, 8 pF, 10 ppm, ABM11W", ESR (Equivalent Series Resistance)=100Ω, Frequency=24MHz, Frequency Stability=20ppm, Frequency Tolerance=0.001%, Load Capacitance=8pF, Manufacturer=Abracon, Max Operating Temperature=85°C, Min Operating Temperature=-40°C, Package="SMD-4 Abracon LLC", Supplier Part Number=535-13835-1-ND, Category=Crystals, Check_prices=https://www.snapeda.com/parts/ABM11W-24.0000MHZ-8-D1X-T3/Abracon/view-part/?ref=eda, China RoHS=Compliant, ComponentLink1Description=https://datasheet.octopart.com:443/ABM11W-24.0000MHZ-8-D1X-T3-Abracon-datasheet-154833168.pdf?src-supplier=IHS, ComponentLink1URL=https://datasheet.octopart.com:443/ABM11W-24.0000MHZ-8-D1X-T3-Abracon-datasheet-154833168.pdf?src-supplier=IHS, ComponentLink2Description=https://datasheet.octopart.com:443/ABM11W-24.0000MHZ-8-D1X-T3-Abracon-datasheet-102760955.pdf?src-supplier=Upverter, ComponentLink2URL=https://datasheet.octopart.com:443/ABM11W-24.0000MHZ-8-D1X-T3-Abracon-datasheet-102760955.pdf?src-supplier=Upverter, ComponentLink3Description=https://datasheet.octopart.com:443/ABM11W-24.0000MHZ-8-D1X-T3-Abracon-datasheet-112015802.pdf?src-supplier=Master+Electronics, ComponentLink3URL=https://datasheet.octopart.com:443/ABM11W-24.0000MHZ-8-D1X-T3-Abracon-datasheet-112015802.pdf?src-supplier=Master+Electronics, ComponentLink4Description=https://datasheet.octopart.com:443/ABM11W-24.0000MHZ-8-D1X-T3-Abracon-datasheet-182204996.pdf?src-supplier=Master+Electronics, ComponentLink4URL=https://datasheet.octopart.com:443/ABM11W-24.0000MHZ-8-D1X-T3-Abracon-datasheet-182204996.pdf?src-supplier=Master+Electronics, ComponentLink5Description=https://sigma.octopart.com:443/141159858/technical_drawing/Abracon-ABM11W-24.0000MHZ-8-D1X-T3.pdf?src-supplier=Abracon+SCT, ComponentLink5URL=https://sigma.octopart.com:443/141159858/technical_drawing/Abracon-ABM11W-24.0000MHZ-8-D1X-T3.pdf?src-supplier=Abracon+SCT, ComponentLink6Description=http://sigma.octopart.com:80/conflict_mineral_statement/Abracon-company-27.pdf?src-supplier=Compliance+Statements, ComponentLink6URL=http://sigma.octopart.com:80/conflict_mineral_statement/Abracon-company-27.pdf?src-supplier=Compliance+Statements, ESR=30Ω, Height=500µm, Length=2mm, Lifecycle Status=Production, Manufacturer Part Number=ABM11W-24.0000MHZ-8-D1X-T3, MF="Abracon LLC", Mounting Technology="Surface Mount", MP=ABM11W-24.0000MHZ-8-D1X-T3, Pricing="1=0,38, 10=0,334, 25=0,3156, 50=0,3024, 100=0,29, 250=0,27424, 500=0,26288, 1000=0,25201 (USD)", REACH SVHC=Yes, RoHS=Compliant, SnapEDA_Link=https://www.snapeda.com/parts/ABM11W-24.0000MHZ-8-D1X-T3/Abracon/view-part/?ref=snap, Stock=2752, Supplier=DigiKey, Tolerance=0.001%, Width=1.6mm

## Free pads (board coordinates)
  round 1 smd paste+0: 4(95.377,83.058) 4(100.699,62.075) 4(106.172,82.105) 4(107.8,67.1) 4(107.95,94.361) 4(108.839,72.898) 4(109.982,83.566) 4(110.296,71.942) 4(110.6,68.3) 4(114.681,94.234)
  round 0.8 smd paste+0: 4(110.109,78.978)

## Via types
v1: diameter 0.8, hole 0.4, Top Layer to Bottom Layer, 148 vias
v2: diameter 0.6, hole 0.3, Top Layer to Bottom Layer, 124 vias
v3: diameter 5, hole 3.2, Top Layer to Bottom Layer, 4 vias
v4: diameter 1, hole 0.5, Top Layer to Bottom Layer, 1 vias

## Nets (pads, with @x,y where several pads share a name; then routed paths per layer and width w, separated by ;. In a path a pad name is that pad's centre, name@x,y a point inside that pad or via, vN(x,y) a via of type N, cw(c..) or ccw(c..) an arc to the next point about the centre after c; other vN are vias at no path point)
+3V3: B1.1 B1.24 B1.36 B1.48 C3.1 C10.1 C11.1 C12.1 C13.1 C14.1 C15.1 C17.1 C34.1 D2.1 D6.1 J4.1 J5.9 J5.10 L1.2 L2.2 R2.2 R3.2 R14.1 R16.1 R18.1 R20.1 R22.1 R24.1 U1.3 U2.2 U2.4 | length 203.7
  Top Layer w0.3: B1.1@97.489,74.759 97.489,76.153 v2(97.536,76.2) ; v2(98.806,77.597) 98.977,77.426 B1.48@98.977,76.247 ; B1.24@104.477,67.771 104.477,66.846 105.353,65.97 105.607,65.97 v2(105.664,65.913) ; B1.36@105.965,74.759 106.735,74.759 107.033,75.057 v2(107.061,75.057)
  Top Layer w0.5: R16.1@70.358,63.22 70.358,62.484 71.642,61.2 74.4,61.2 75.049,61.849 77.089,61.849 77.787,62.547 R20.1@77.787,63.22 77.814,63.247 77.814,64.593 v1(77.841,64.62) ; v2(70.612,55.753) R18.1@70.612,57.124 ; v2(77.216,55.499) 77.343,55.372 78.867,55.372 ; R14.1@78.088,57.124 78.088,56.151 78.867,55.372 ; v1(85.1,64.7) 85.1,64.619 85.215,64.503 R22.1@85.215,63.22 ; R24.1@85.565,57.124 85.565,56.04 86.233,55.372 ; v1(92.456,58.039) 92.456,56.261 91.567,55.372 ; J5.9@101.437,59.563 J5.9@101.473,59.563 J5.10@101.473,57.023 99.822,55.372 91.567,55.372 ; v1(115.9,72.5) D2.1@116.345,72.5 ; 78.867,55.372 86.233,55.372 ; 86.233,55.372 91.567,55.372
  Bottom Layer w0.3: C14.1@94.237,75.438 C14.1@94.615,75.06
  Bottom Layer w0.5: v2(70.612,55.753) 70.639,55.753 70.893,55.499 v2@77.189,55.499 ; v1(77.841,64.62) 77.881,64.66 85.06,64.66 v1(85.1,64.7) ; 91.993,70.739 95.885,70.739 96.393,70.231 96.393,69.85 97.67,68.573 97.67,67.913 97.895,67.688 C3.1@98.171,67.688 ; C17.1@92.202,66.929 90.829,66.929 88.543,64.643 85.157,64.643 87.8,62 87.8,59 88.507,58.293 U1.3@90.989,58.293 91.039,58.243 92.171,58.243 92.375,58.039 v1(92.456,58.039) ; 92.65,75 92.65,76.25 93.25,76.85 94.15,76.85 95.518,78.218 96.225,78.218 96.407,78.4 97.1,78.4 97.5,78 97.5,76.236 v2(97.536,76.2) ; R2.2@98.324,56.388 100.554,56.388 101.189,57.023 J5.10@101.473,57.023 103.124,55.372 115.443,55.372 ; C3.1@98.367,67.688 98.592,67.913 98.592,68.62 99.21,69.238 L1.2@100.076,69.238 L1.2@100.203,69.238 ; v2(98.806,77.597) 100.203,76.2 105.918,76.2 v2(107.061,75.057) 107.061,67.31 v2(105.664,65.913) ; C10.1@104.394,75.06 104.395,75.059 v2@106.862,75.059 ; v1(115.9,72.5) 115.9,71.5 116.6,70.8 117.9,70.8 118.95,71.85 119.75,71.85 120.925,73.025 124.841,73.025 126.238,71.628 ; R3.2@116.052,57.023 116.052,56.033 116.078,56.007 115.443,55.372 ; J4.1@126.238,66.421 126.238,71.628 ; 115.443,55.372 128.778,55.372 132.4,58.994 132.4,65.466 126.238,71.628
+5V: B2.14 B3.1 C19.1 C24.1 C25.1 C27.1 J6.3 J6.6 J7.3 J7.6 J8.2 J11.1 J11.2 L3.2 pad.4@95.377,83.058 R7.1 U2.3 | length 28.6
  Top Layer w0.6: v1(87.884,81.28) 90.805,81.28 ; 90.805,82.169 93.345,82.169 ; 103.505,86.971 J8.2@103.505,90.449
  Bottom Layer w0.6: U2.3@80.768,77.357 C27.1@80.775,80.645 83.678,80.645 ; J11.1@83.678,85.911 J11.2@83.678,83.371 83.678,80.645 ; v1(87.884,81.28) 84.366,81.28 83.731,80.645 83.678,80.645 ; J8.2@103.505,90.449 103.607,90.551 B2.14@107.199,90.551
  other v1: 90.678,90.297 91.821,90.297 90.678,91.44 91.821,91.44 90.678,92.583 91.821,92.583 90.678,93.853 91.821,93.853
+12V: F1.1 J1.2
  other v2: 63.068,98.552 63.932,98.552 64.795,98.552 65.659,98.552 66.523,98.552 67.386,98.552 61.849,99.187 68.199,99.314 61.849,100.076 68.199,100.203 61.849,100.965 68.199,101.092 62.941,101.6 63.805,101.6 64.668,101.6 65.532,101.6 66.396,101.6 67.259,101.6
CAN_H: IC1.1 J10.4 R4.2 U1.7 | length 27.4
  Bottom Layer w0.3: J10.4@62.875,63.122 62.875,61.725 63.7,60.9 70.15,60.9 IC1.1@71.15,59.9 71.174,59.924 71.624,59.924 73.13,61.43 80.877,61.43 81.9,60.407 81.9,59.945 82.245,59.6 R4.2@82.95,59.6 83.45,59.1 84.8,59.1 85.263,59.563 U1.7@86.049,59.563
CAN_L: IC1.2 J10.5 R5.2 U1.6 | length 34.6
  Bottom Layer w0.3: J10.5@64.643,64.89 62.41,64.89 62.4,64.9 61.3,63.8 61.3,62.4 63.3,60.4 68.8,60.4 69.3,59.9 IC1.2@69.85,59.9 69.85,59.55 70.4,59 71.5,59 73.4,60.9 80.7,60.9 81.4,60.2 81.4,59.35 82.95,57.8 R5.2@82.95,57.7 ; R5.2@82.95,57.85 83.6,58.5 85.157,58.5 85.364,58.293 U1.6@86.049,58.293
CAN_RX: B1.26 pad.4@107.8,67.1 U1.4 | length 33.7
  Top Layer w0.3: B1.26@105.965,69.759 108.563,69.759 108.888,69.433 v2(108.888,69.361) 108.771,69.361 107.8,68.39 pad.4@107.8,67.1
  Bottom Layer w0.3: U1.4@90.989,57.023 92.823,57.023 93.3,57.5 93.3,62.6 94.708,64.008 105.664,64.008 109.6,67.944 109.6,68.65 v2(108.888,69.361)
CAN_RX_LED: B1.33 D5.1 | length 13.3
  Top Layer w0.3: B1.33@105.965,73.259 107.759,73.259 108.248,73.748 110.352,73.748 115.7,68.4 D5.1@116.85,68.4
CAN_TX: B1.27 pad.4@110.6,68.3 U1.1 | length 28.8
  Top Layer w0.3: B1.27@105.965,70.259 109.121,70.259 109.78,69.6 109.78,68.78 109.3,68.3 ; v2(108.9,68.3) 109.3,68.3 ; pad.4@110.6,68.3 109.3,68.3
  Bottom Layer w0.3: U1.1@90.989,60.833 91,60.844 91,61.5 94.143,64.643 105.384,64.643 108.75,68.009 108.75,68.069 108.9,68.219 v2(108.9,68.3)
CAN_TX_LED: B1.34 D4.1 | length 12.7
  Top Layer w0.3: B1.34@105.965,73.759 106.64,73.759 107.46,73.759 108.001,74.3 110.9,74.3 114.8,70.4 D4.1@116.85,70.4
EN: B3.7 R6.1 | length 5.1
  Top Layer w0.4: B3.7@92.219,99.994 92.219,102.506 92.71,102.997 R6.1@94.589,102.997
FB: B3.2 C19.2 R9.2 | length 7.8
  Top Layer w0.4: B3.2@92.219,96.744 92.228,96.753 93.239,96.753 93.98,96.012 C19.2@93.98,93.729 96.009,93.729 96.34,93.398 R9.2@96.34,92.456